# EAGLE board ch2 (EAGLE 9.2.2)
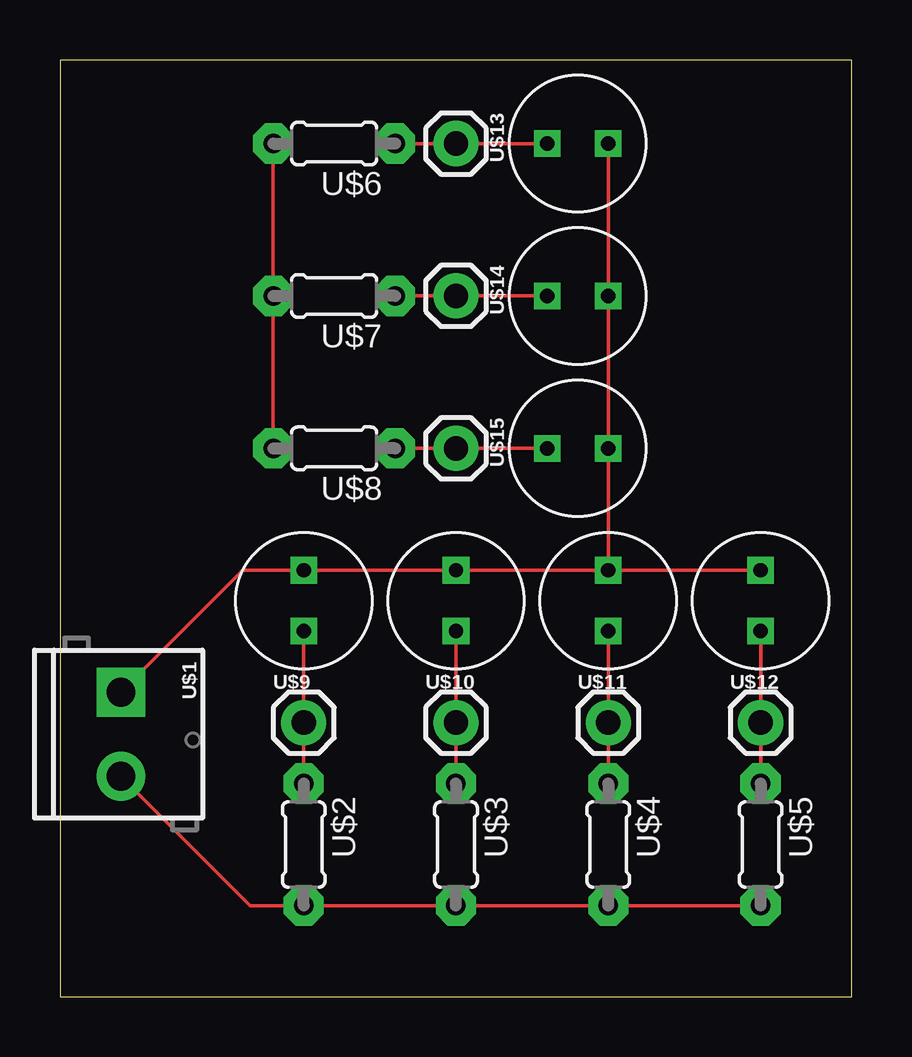
[diagram p0: board, top side]
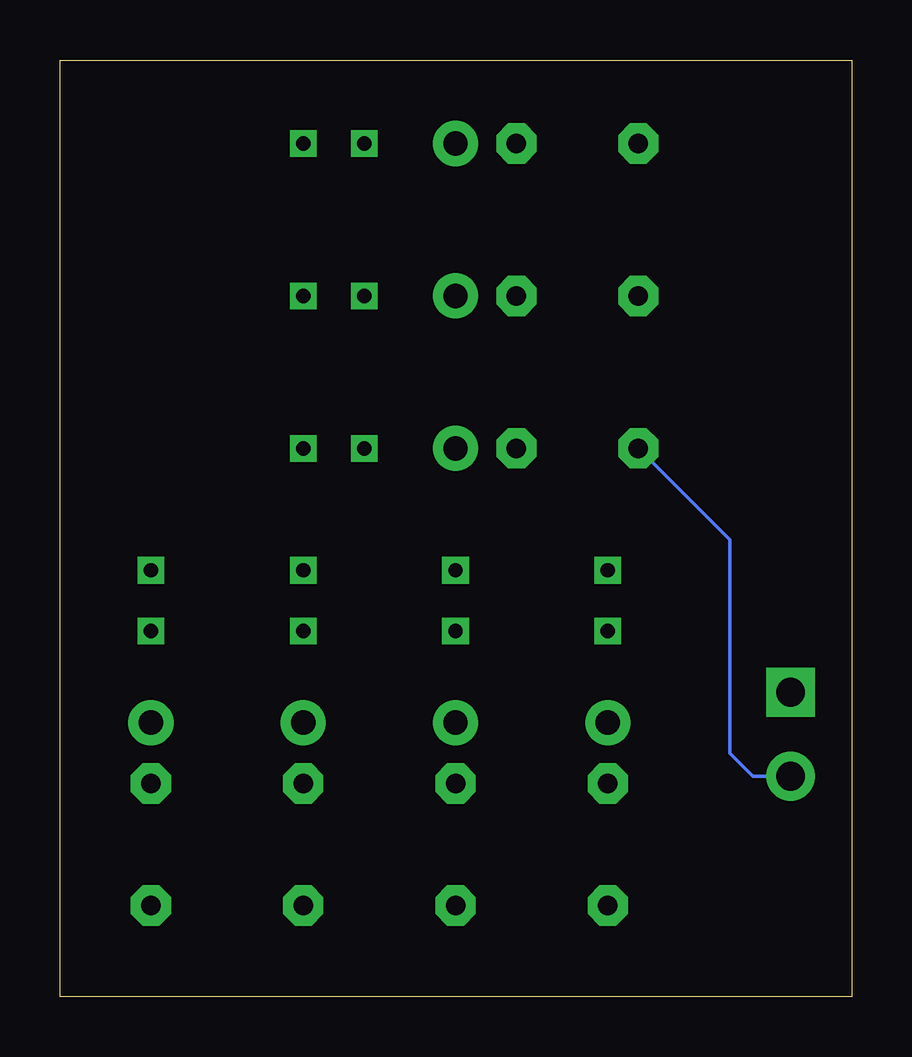
[diagram p1: board, bottom side, seen from below]

Size 33 x 39.04 mm. Coordinates in mm from the lower left corner, seen from the top.
Outline: 0,0 33,0 33,39.04 0,39.04 0,0
Copper layers (1*16): Top 0.035mm / dielectric 1.5mm / Bottom 0.035mm
Design rules "default": minimum track width 6mil, minimum drill 0.35mm, track to track 6mil, track to pad 6mil, pad to pad 6mil, via to via 6mil, smd to smd 6mil, copper to edge 40mil, drill to drill 6mil, minimum pad ring 10mil, minimum via ring 8mil, stop-mask expansion 4mil, vias tented up to drill 0mil, thermal gap 10mil

## Footprints (pad centres in the part's own frame; a part is rotated, then mirrored left to right if it is on the bottom)
TERMINAL_CONN_2 = drill 1.2 pad 2.032 square: 1 0,0 | drill 1.2 pad 2.032: 2 3.5,0
RESISTOR = drill 0.813 pad 1.676 octagon: 1 -2.54,0; 2 2.54,0
1X01 = drill 1.016 pad 1.88: 1 0,0
PHOTORESISTOR = drill 0.6 square: P$1 -1.27,0; P$2 1.27,0

## Placement (x,y rotation side)
U$1  TERMINAL_CONN_2  [TERMINAL_CONN_2]  2.54,12.7 270 top
U$2  RESISTOR  [RESISTOR]  10.16,6.35 270 top
U$3  RESISTOR  [RESISTOR]  16.51,6.35 270 top
U$4  RESISTOR  [RESISTOR]  22.86,6.35 270 top
U$5  RESISTOR  [RESISTOR]  29.21,6.35 270 top
U$6  RESISTOR  [RESISTOR]  11.43,35.56 180 top
U$7  RESISTOR  [RESISTOR]  11.43,29.21 180 top
U$8  RESISTOR  [RESISTOR]  11.43,22.86 180 top
U$9  CONN_01  [1X01]  10.16,11.43 0 top
U$10  CONN_01  [1X01]  16.51,11.43 0 top
U$11  CONN_01  [1X01]  22.86,11.43 0 top
U$12  CONN_01  [1X01]  29.21,11.43 0 top
U$13  CONN_01  [1X01]  16.51,35.56 270 top
U$14  CONN_01  [1X01]  16.51,29.21 270 top
U$15  CONN_01  [1X01]  16.51,22.86 270 top
U$16  PHOTORESISTOR  [PHOTORESISTOR]  10.16,16.51 90 top
U$17  PHOTORESISTOR  [PHOTORESISTOR]  16.51,16.51 90 top
U$18  PHOTORESISTOR  [PHOTORESISTOR]  22.86,16.51 90 top
U$19  PHOTORESISTOR  [PHOTORESISTOR]  29.21,16.51 90 top
U$20  PHOTORESISTOR  [PHOTORESISTOR]  21.59,35.56 0 top
U$21  PHOTORESISTOR  [PHOTORESISTOR]  21.59,29.21 0 top
U$22  PHOTORESISTOR  [PHOTORESISTOR]  21.59,22.86 0 top

## Library data of the parts
U$1-U$22 = ECE5_WS(7)

## Nets
N$1: U$1.2 U$2.2 U$3.2 U$4.2 U$5.2 U$6.2 U$7.2 U$8.2
N$2: U$2.1 U$9.1 U$16.P$1
N$3: U$3.1 U$10.1 U$17.P$1
N$4: U$4.1 U$11.1 U$18.P$1
N$5: U$5.1 U$12.1 U$19.P$1
N$6: U$6.1 U$13.1 U$20.P$1
N$7: U$7.1 U$14.1 U$21.P$1
N$8: U$8.1 U$15.1 U$22.P$1
N$9: U$1.1 U$16.P$2 U$17.P$2 U$18.P$2 U$19.P$2 U$20.P$2 U$21.P$2 U$22.P$2

## Tracks (layer width: path | path; a pad name or v marks a point on that pad's centre or on a via)
N$1
  Top 0.152: U$5.2 U$4.2 U$3.2 U$2.2 7.93,3.81 U$1.2 | U$6.2 U$7.2 U$8.2
  Bottom 0.152: U$8.2 5.08,19.05 5.08,10.16 4.12,9.2 U$1.2
N$2
  Top 0.152: U$16.P$1 U$9.1 U$2.1
N$3
  Top 0.152: U$17.P$1 U$10.1 U$3.1
N$4
  Top 0.152: U$18.P$1 U$11.1 U$4.1
N$5
  Top 0.152: U$19.P$1 U$12.1 U$5.1
N$6
  Top 0.152: U$20.P$1 U$13.1 U$6.1
N$7
  Top 0.152: U$21.P$1 U$14.1 U$7.1
N$8
  Top 0.152: U$22.P$1 U$15.1 U$8.1
N$9
  Top 0.152: U$20.P$2 U$21.P$2 U$22.P$2 U$18.P$2 | U$18.P$2 U$19.P$2 | U$18.P$2 U$17.P$2 U$16.P$2 7.62,17.78 U$1.1